# Altium PCB LED_Flasher.PcbDoc
Units mil, origin at the board's own origin, x right, y up, seen from the top; angles counter-clockwise.
Board outline 806.23 x 806.23 mil, 2 copper layers (Top Layer, Bottom Layer); 11 components, 7 nets, 27 pads, 2 vias.
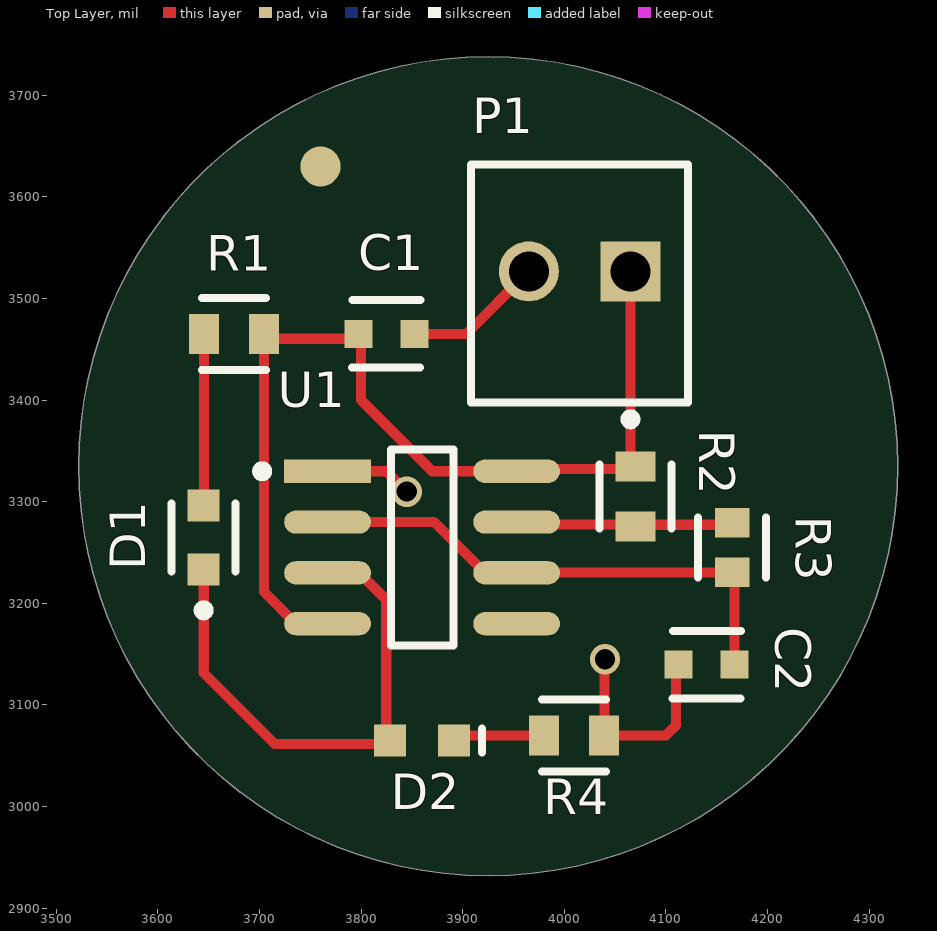
[diagram p0: Top Layer view]
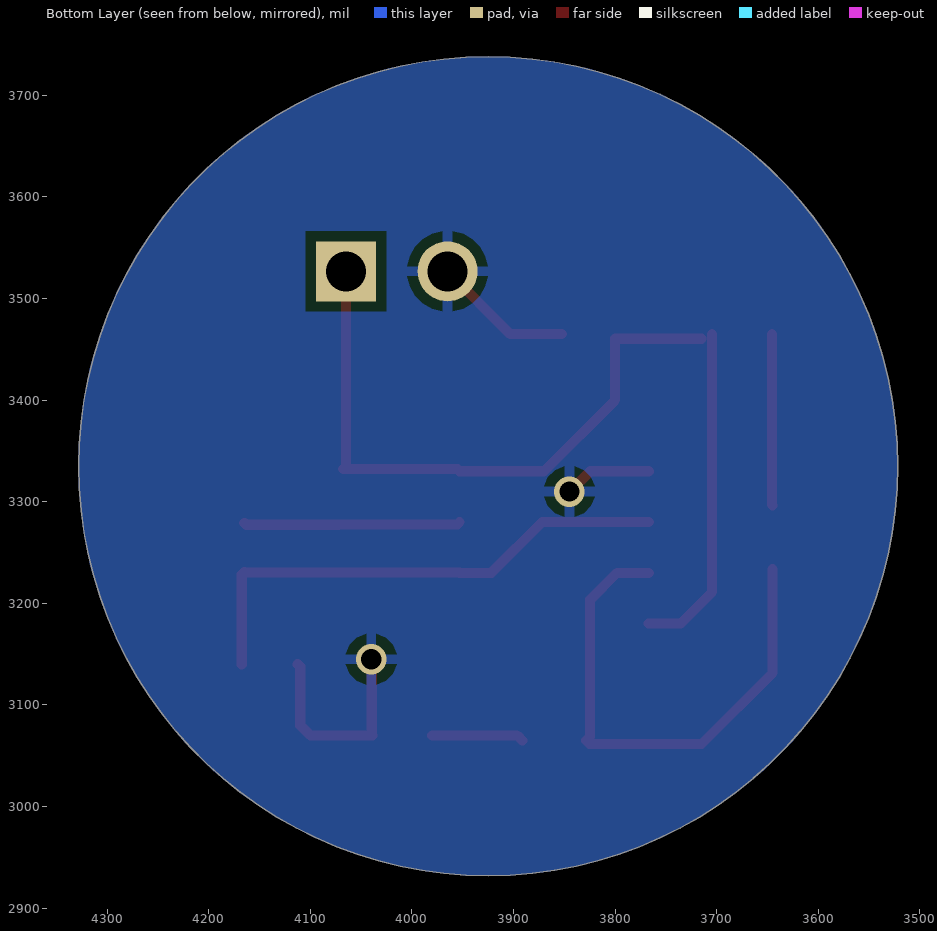
[diagram p1: Bottom Layer view, seen from below]
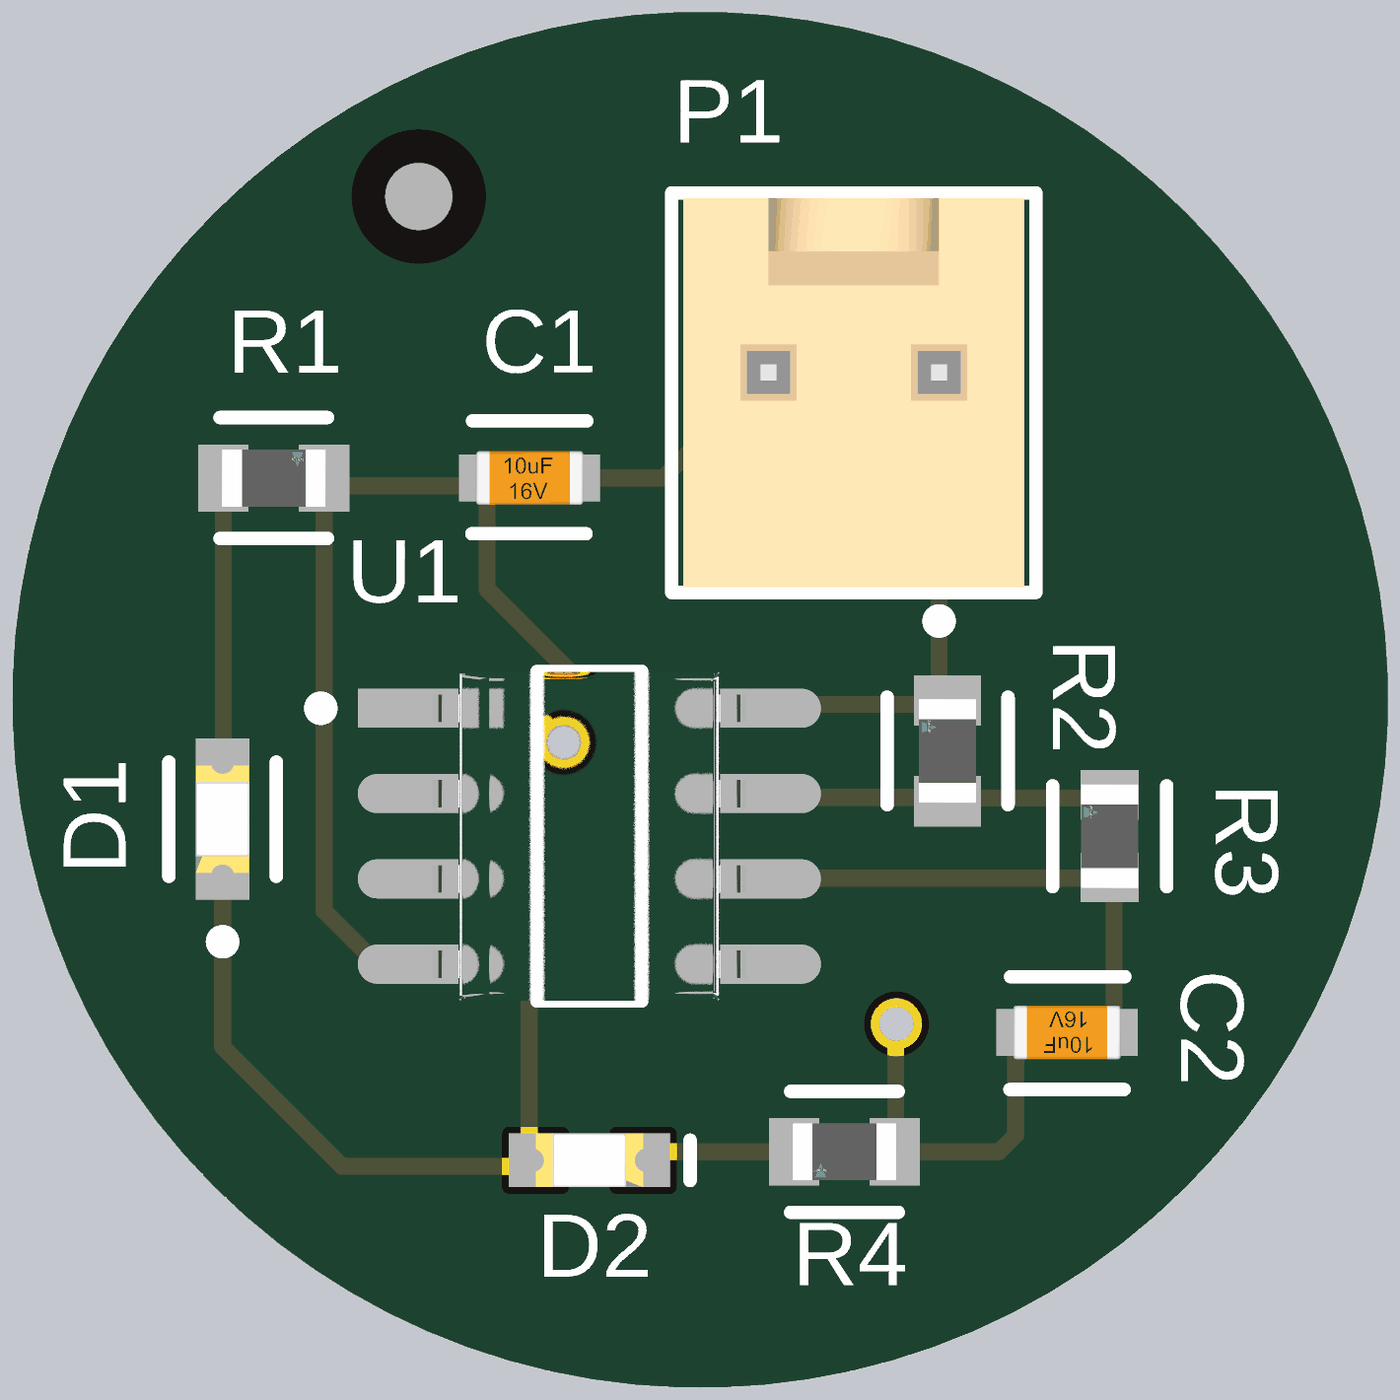
[diagram p2: 3D render of the assembled board from above, using the file's embedded part models]

## Layer stack, top to bottom
Top Solder: solder mask 0.4, Solder Resist, Dk 3.5
Top Layer: signal copper 1.4
Dielectric 1: dielectric 12.6, FR-4, Dk 4.8
Bottom Layer: signal copper 1.4
Bottom Solder: solder mask 0.4, Solder Resist, Dk 3.5

## Board outline
3521.89,3335 ccw(c3925,3335) 3925,2931.89 ccw(c3925,3335) 4328.11,3335 ccw(c3925,3335) 3925,3738.11 ccw(c3925,3335)

## Design rules (kind name [scope] priority, off if disabled: settings)
Clearance [All] p1: gap=10 ignorepadtopadclearanceinfootprint=FALSE except(0: Arc-Hole Track-Hole SMDPad-Hole THPad-Hole Via-Hole Fill-Hole Poly-Hole Region-Hole Text-Hole)
PolygonConnect [All] p1: connectstyle=Relief reliefconductorwidth=10 reliefentries=4 polygonreliefangle="90 Angle" airgapwidth=10
RoutingVias [All] p1: holewidth=28 width=50 viastyle="Through Hole" minholewidth=28 minwidth=50 maxholewidth=28 maxwidth=50
SilkToSolderMaskClearance [IsText] p1: minsilkscreentomaskgap=10 clearancetoexposedcopper=TRUE
SolderMaskExpansion [All] p1: expansion=4 istentingtop=FALSE
Width [All] p1: maxlimit=10 minlimit=10 preferedwidth=10
29 further rules are at their usual default settings.

## Classes and differential pairs
component class Led_Flasher: C1 C2 D1 P1 R1 R2 R3 R4

## Components (designator, comment, footprint, x,y, rotation, side; value= is the part's Value field where it differs from the comment)
C1 "C1608X5R1C106M080AB" FP-C1608-MFG 3825,3465 r0 top value=10uF
C2 "C1608X5R1C106M080AB" FP-C1608-MFG 4140,3140 r180 top value=10uF
D1 "150060RS75000" FP-150060RS75000-MFG 3645,3265 r90 top
D2 "150060BS75000" 0603_A 3860,3065 r180 top
P1 "61900211121" 61900211121 4015,3515 r0 top
R1 "CRCW06031K00FKEA" FP-CRCW0603-e3-MFG 3675,3465 r0 top
R2 "CRCW06031K00FKEA" FP-CRCW0603-e3-MFG 4070,3305 r90 top
R3 "CRCW0603100KFKEA" FP-CRCW0603-e3-IPC_C 4165,3255 r90 top
R4 "CRCW06031K00FKEA" FP-CRCW0603-e3-MFG 4009.53,3070 r180 top
U1 "TLC555CDR" FP-D0008A-IPC_B 3860,3255 r0 top
? "Comment" FIDUCIAL 3760,3630 r0 top

## Footprints (in the part's own frame and the unit in brackets; to place one, negate y for a bottom-side part, rotate by r counter-clockwise, add the part's x,y. Pads: shape width x height; smd on the part's side, far side on the other; paste and mask are expansions set on the pad)
0603_A [mm] "Chip LED, 2-Leads, Body 1.6x0.8mm, IPC Medium Density"
  rect 0.8x0.8 smd: 1(-0.8,0) 2(0.8,0)
  silkscreen extent -1.5,-0.3 -1.5,0.3, body extent -0.8,-0.4 0.8,0.4, height 0.7
61900211121 [mm] "2.54mm Male Locking Header, 2p"
  rect 1.5x1.5 hole 1: 1(1.27,0.3)
  round 1.5 hole 1: 2(-1.27,0.3)
  silkscreen extent -2.71,-3.52 2.71,2.98, body extent -2.54,-2.9 2.54,2.9, height 11.53
FIDUCIAL [mm] "FIDUCIAL 1mm SOLDER MASK 2mm KEEP OUT 2mm"
  round 1 smd mask+0.5: 0(0,0)
FP-150060RS75000-MFG [mm]
  rect 0.8x0.8 smd paste+0 mask+0: 1(-0.8,0) 2(0.8,0)
  silkscreen extent -1.95,-0.8 0.85,0.8, body extent -1.3,-0.55 1.3,0.55, height 0.25
FP-C1608-MFG [mm]
  rect 0.7x0.7 smd paste+0 mask+0: 1(-0.7,0) 2(0.7,0)
  silkscreen extent -0.86,-0.83 0.85,0.85, body extent -1.15,-0.55 1.15,0.55, height 0.25
FP-CRCW0603-e3-IPC_C [mil]
  rect 28.94x33.94 smd paste+0 mask+0: 1(-24.23,0) 2(24.23,0)
  silkscreen extent -30,-33 30,33, body extent -43,-23 43,23, height 10
FP-CRCW0603-e3-MFG [mm]
  rect 0.75x1 smd paste+0 mask+0: 1(-0.75,0) 2(0.75,0)
  silkscreen extent -0.8,-0.9 0.8,0.9, body extent -1.22,-0.6 1.22,0.6, height 0.25
FP-D0008A-IPC_B [mil]
  rect 85.4x22.92 smd paste+0 mask+0: 1(-93.06,75)
  rrect100% 85.4x22.92 smd paste+0 mask+0: 2(-93.06,25) 3(-93.06,-25) 4(-93.06,-75) 5(93.06,-75) 6(93.06,-25) 7(93.06,25) 8(93.06,75)
  silkscreen extent -162,-97 31,97, body extent -146,-106 146,106, height 10

## Part data
C1 C2: library part CMP-08246-000019-1, "CAP CER 10UF 16V X5R 0603", Capacitance=10uF, Manufacturer="TDK Corporation", Package=C1608, Temperature="-55°C to +85°C", Temperature Characteristic=X5R, Temperature Coefficient=15%, Temperature Range High=+85°C, Temperature Range Low=-55°C, Tolerance=20%, Voltage Rating=16V, Automotive=No, Category=Cap, ComponentLink2Description=Datasheet, ComponentLink2URL=https://upverter.com/datasheet/6fbac97fd59b4a24a005814037d2a36a27db40e9.pdf, Device Class L1="Passive Components", Device Class L2=Capacitors, Device Class L3="Ceramic Capacitors", Digikey Description="CAP CER 10UF 16V X5R 0603", Height=0.9mm, Ipc Land Pattern Name=CAPC16080X80, Lead Free=Yes, Manufacturer Part Number=C1608X5R1C106M080AB, Material=Ceramic, Mouser Description="Multilayer Ceramic Capacitors MLCC - SMD/SMT 0603 10uF 16volts X5R +/-20% GP", Octopart=https://octopart.com/c1608x5r1c106m080ab-tdk-26013480, RoHS=TRUE
D1: library part CMP-1426-00001-2, "LED RED CLEAR 0603 SMD", Case Code (Imperial)=0603, Case Code (Metric)=1608, Color=Red, Forward Current=30mA, Forward Voltage=2V, Lens Color=Colorless, Max Operating Temperature=85°C, Min Operating Temperature=-40°C, Package Quantity=1, Test Current=20mA, Case/Package=0603, Dominant Wavelength=625nm, Height=0.8mm, Length=1.6mm, Lens Size=0.7mm, Lens Style=Clear, Lens Transparency=Clear, Luminous Intensity=250mcd, Mount="Surface Mount", Packaging="Cut Tape", RoHS Compliant=Yes, Series=WL-SMCW, Viewing Angle=140°, Wavelength=625nm, Width=0.8mm
D2: library part CMP-1426-00003-1, "SMD mono-color Chip LED, WL-SMCW, Blue", Color=Blue, Manufacturer="Wuerth Elektronik", ComponentLink1Description="Manufacturer URL", ComponentLink1URL=http://www.we-online.com, ComponentLink2Description=Datasheet, ComponentLink2URL=http://katalog.we-online.com/led/datasheet/150060BS75000.pdf, PackageReference=0603_A, PartNumber=150060BS75000
P1: library part CMP-1502-00584-1, "Male Locking Header WR-WTB, THT, Vertical, pitch 2.54 mm, 1 x 2 position", Contact Resistance=20mOhm, Manufacturer="Wurth Elektronik", Operating temperature=-40to105degC, Working Voltage=250VAC, Datasheet URL=https://katalog.we-online.de/em/datasheet/6190xx11121.pdf, Gender=Male, Manufacturer URL=http://www.we-online.de, Mounting Technology=THT, Orientation=Vertical, Package Reference=61900211121, Packaging=Bag, Part Number=61900211121, Pitch=2.54mm, Position=1x2, Publisher=WurthElektronik
R1 R2 R4: library part CMP-1666-00003-5, "RES Thick Film, 1kΩ, 1%, 0.1W, 100ppm/°C, 0603", Case Code (Imperial)=0603, Case Code (Metric)=1608, Max Operating Temperature=155°C, Max Power Dissipation=100mW, Min Operating Temperature=-55°C, Package Quantity=10, Resistance=1kR, Temperature Coefficient=100ppm/°C, Tolerance=1%, Voltage Rating=75V, Case/Package=0603, Composition="Thick Film", Contact Plating=Tin, Depth=0.85mm, Features="Automotive AEC-Q200", Height=0.45mm, Lead Free="Lead Free", Length=1.55mm, Military Standard=Not, Mount="Surface Mount", Number of Pins=2, Number of Terminations=2, Packaging="Tape and Reel", Power Rating=100mW, Radiation Hardening=No, Termination=SMD/SMT, Voltage Rating (DC)=75V, Weight=7.1E-05oz, Width=0.033inch
R3: library part CMP-2000-03820-2, "RES Thick Film, 100kΩ, 1%, 0.1W, 100ppm/°C, 0603", Case Code (Imperial)=0603, Case Code (Metric)=1608, Max Operating Temperature=155°C, Max Power Dissipation=100mW, Min Operating Temperature=-55°C, Package Quantity=10, Resistance=100kR, Temperature Coefficient=100ppm/°C, Tolerance=1%, Voltage Rating=75V, Case/Package=0603, Composition="Thick Film", Contact Plating=Tin, Depth=0.85mm, Features="Automotive AEC-Q200", Height=0.45mm, Lead Free="Lead Free", Length=1.55mm, Military Standard=Not, Number of Pins=2, Number of Terminations=2, Packaging="Tape and Reel", Power Rating=100mW, Radiation Hardening=No, Termination=SMD/SMT, Voltage Rating (DC)=75V, Weight=7.1E-05oz, Width=0.033inch
U1: library part CMP-04857-000001-1, "IC OSC SGL TIMER 2.1MHZ 8-SOIC", Case/Package=SOIC, Current Rating=250A, Frequency=2.1MHz, High Level Output Current=-10mA, Low Level Output Current=100mA, Max Operating Temperature=125°C, Max Power Dissipation=725mW, Max Supply Voltage=15V, Min Operating Temperature=-40°C, Min Supply Voltage=2V, Operating Supply Current=360uA, Package Quantity=2500, Quiescent Current=250uA, Height=1.58mm, Lead Free="Lead Free", Length=4.9mm, Mount="Surface Mount", Number of Channels=1, Number of Pins=8, Number of Timers/Counters=1, Packaging="Tape and Reel", Power Dissipation=725mW, Radiation Hardening=No, REACH SVHC="No SVHC", Termination=SMD/SMT, Weight=0.002561oz, Width=3.91mm

## Via types
v1: diameter 30, hole 20, Top Layer to Bottom Layer, 2 vias

## Nets (pads, with @x,y where several pads share a name; then routed paths per layer and width w, separated by ;. In a path a pad name is that pad's centre, name@x,y a point inside that pad or via, vN(x,y) a via of type N, cw(c..) or ccw(c..) an arc to the next point about the centre after c; other vN are vias at no path point)
GND: C1.2 C2.2 P1.2 R4.1 U1.1 | length 435.9
  Top Layer w10: U1.1 3824.64,3330 3844.64,3310 v1(3845,3310) ; C1.2 3903.19,3465 P1.2 ; v1(4040,3145) 4039.53,3144.53 4039.53,3070.47 R4.1 4100,3070 4110,3080 4110,3137.56 C2.2
NetC2_1: C2.1 R3.1 U1.2 U1.6 | length 510.9
  Top Layer w10: U1.2 3871.81,3280 3921.81,3230 U1.6 3953.44,3230.39 4164.61,3230.39 R3.1 4167.56,3228.21 C2.1
NetD1_1: D1.1 D2.2 U1.3 | length 524.8
  Top Layer w10: D1.1 3645,3131.5 3715,3061.5 3825,3061.5 D2.2 3824.64,3068.86 3824.64,3203.54 3798.19,3230 U1.3
NetD1_2: D1.2 R1.1 | length 168.7
  Top Layer w10: D1.2 3645.47,3296.97 R1.1
NetD2_1: D2.1 R4.2 | length 90.6
  Top Layer w10: D2.1 3896.5,3070 R4.2
NetR2_1: R2.1 R3.2 U1.7 | length 213.8
  Top Layer w10: U1.7 3955.32,3277.74 4071.49,3277.74 4071.88,3277.35 4163.12,3277.35 R3.2
VCC: C1.1 P1.1 R1.2 R2.2 U1.4 U1.8 | length 968
  Top Layer w10: R1.2 3704.53,3211.18 3735.7,3180 U1.4 ; R1.2@3715,3460.47 3800,3460.47 3800,3400 3870,3330 U1.8 3955.32,3332.26 4067.74,3332.26 4065,3335 P1.1
pads on no net: ?.0 U1.5

## Polygon pours and split planes (outlines as drawn)
GND on Bottom Layer "GND_L02_P000" (solid, pour order 0): 3521.89,3335 ccw(c3925,3335) 3925,2931.89 ccw(c3925,3335) 4328.11,3335 ccw(c3925,3335) 3925,3738.11 ccw(c3925,3335)

## Other copper
Top Layer:
  region net NetD1_2: 3645,3296.5 3645.47,3296.97 3645.47,3465

## Silkscreen, mask and mechanical layers (free items; w line width, h text height)
Mechanical 1:
  circle w10: c3925,3335 r403.11